# Altium PCB SDPRev0_0.PcbDoc
Units mil, origin at the board's own origin, x right, y up, seen from the top; angles counter-clockwise.
Board outline 10690 x 1755 mil, 2 copper layers (Top Layer, Bottom Layer); 16 components, 0 nets, 122 pads, 16 vias.
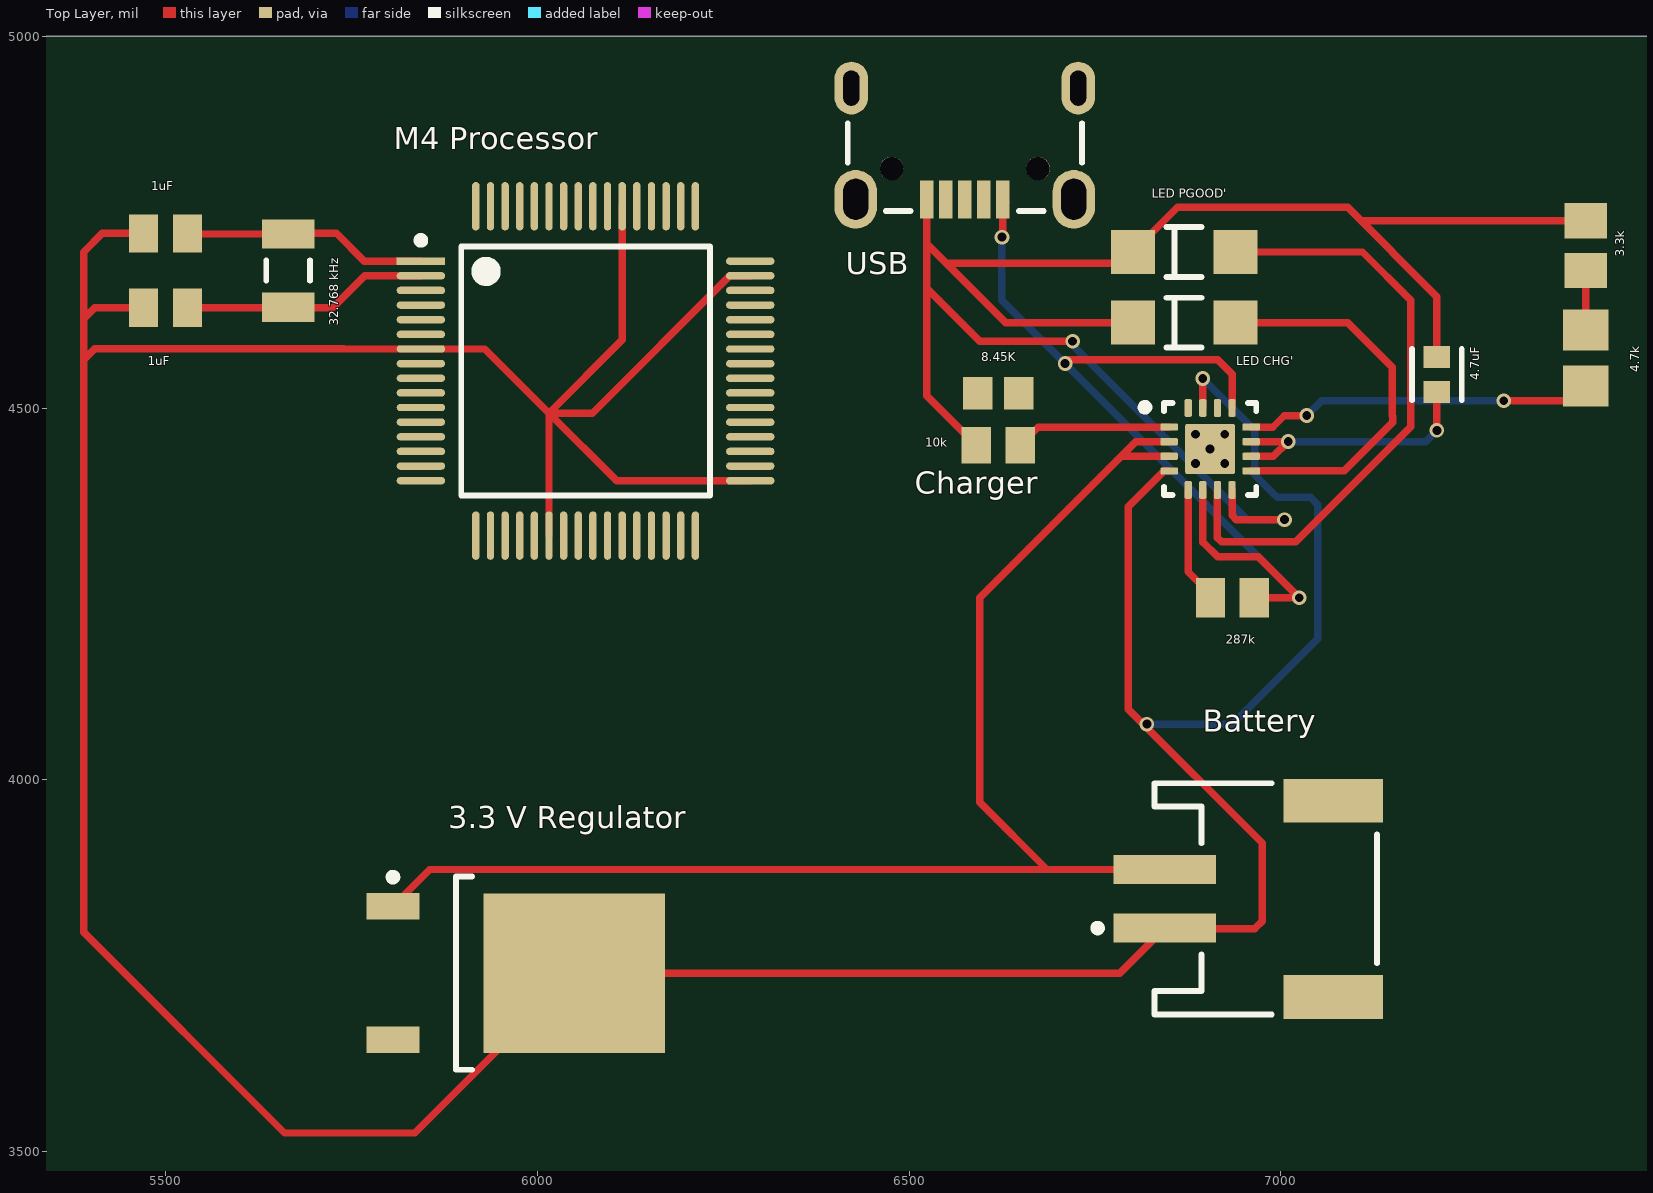
[diagram p0: Top Layer view]
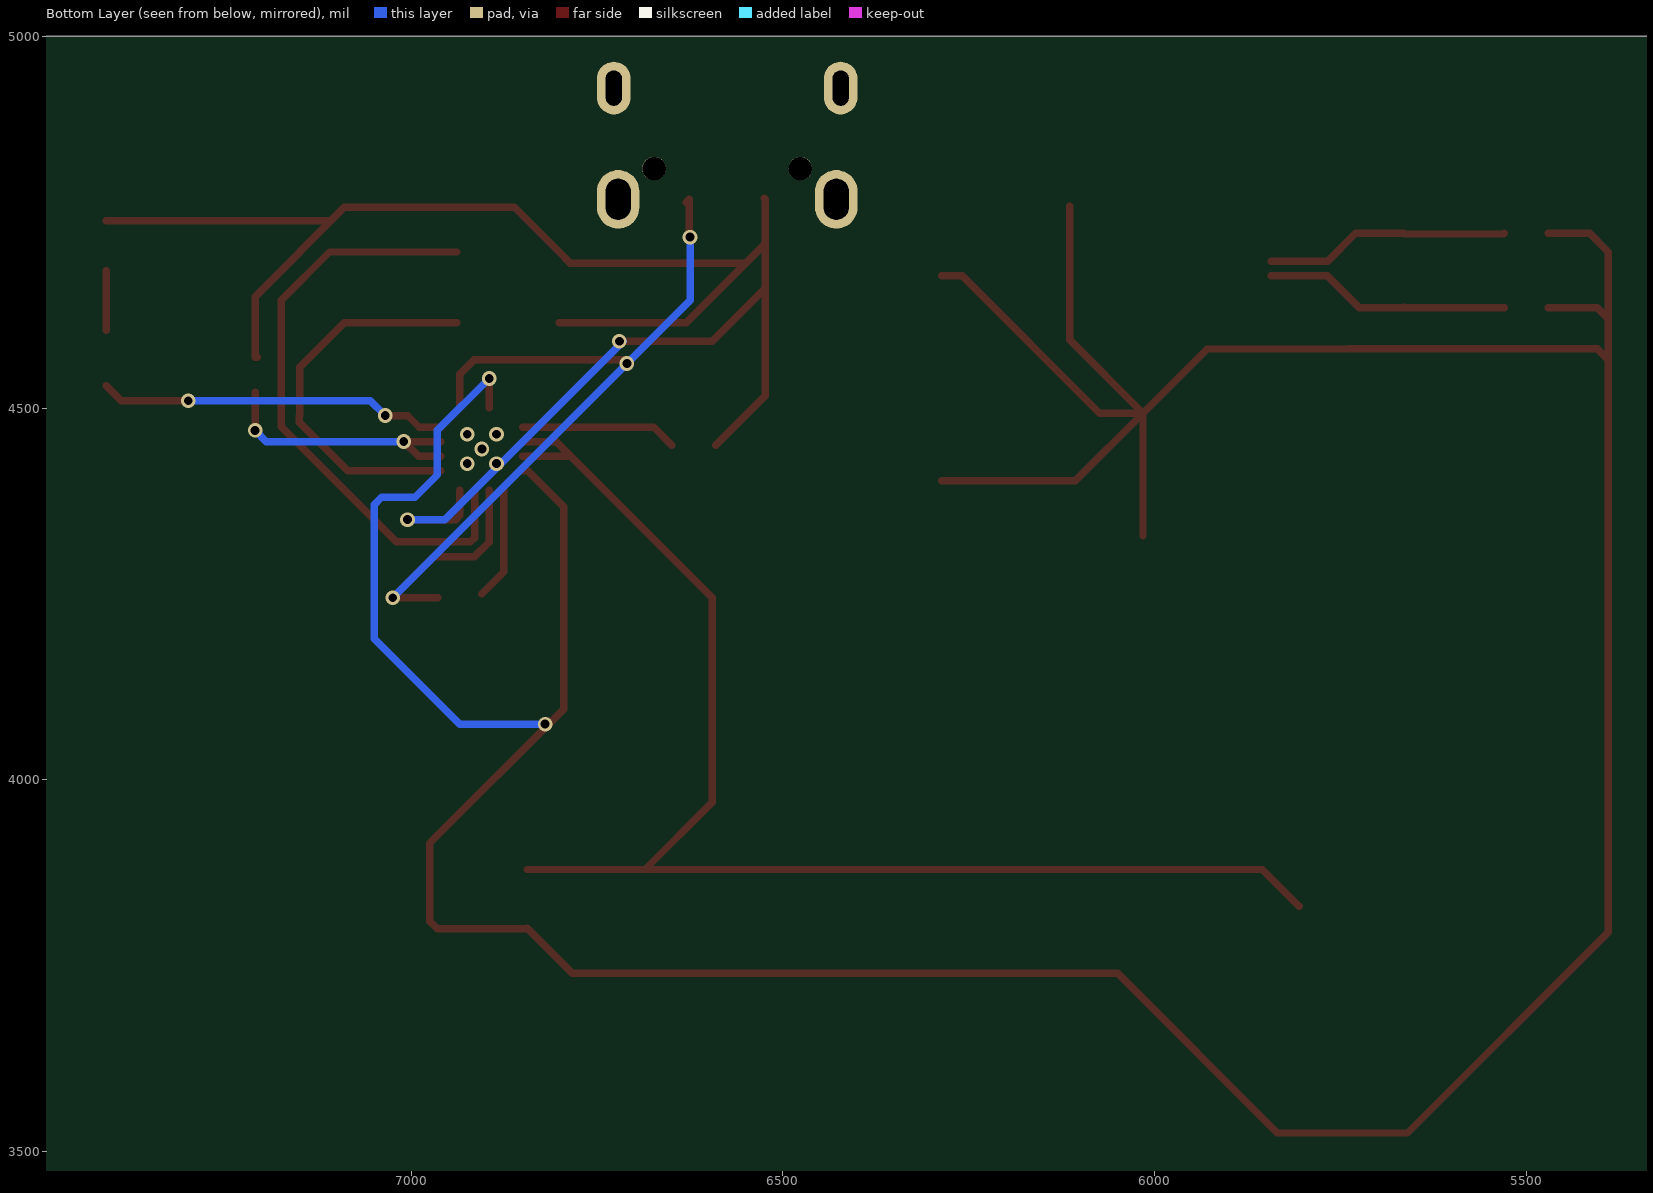
[diagram p1: Bottom Layer view, seen from below]

## Layer stack, top to bottom
Top Solder: solder mask 0.4, Solder Resist, Dk 3.5
Top Layer: signal copper 1.4
Dielectric 1: dielectric 12.6, FR-4, Dk 4.8
Bottom Layer: signal copper 1.4
Bottom Solder: solder mask 0.4, Solder Resist, Dk 3.5

## Board outline
1000,3245 11690,3245 11690,5000 1000,5000

## Design rules (kind name [scope] priority, off if disabled: settings)
Clearance [All] p1: gap=10 ignorepadtopadclearanceinfootprint=FALSE except(0: Arc-Hole Track-Hole SMDPad-Hole THPad-Hole Via-Hole Fill-Hole Poly-Hole Region-Hole Text-Hole)
PolygonConnect [All] p1: connectstyle=Relief reliefconductorwidth=10 reliefentries=4 polygonreliefangle="90 Angle" airgapwidth=10
RoutingVias [All] p1: holewidth=28 width=50 viastyle="Through Hole" minholewidth=28 minwidth=50 maxholewidth=28 maxwidth=50
SolderMaskExpansion [All] p1: expansion=4 istentingtop=FALSE
Width [All] p1: maxlimit=10 minlimit=10 preferedwidth=10
30 further rules are at their usual default settings.

## Components (designator, comment, footprint, x,y, rotation, side; value= is the part's Value field where it differs from the comment)
1uF "Comment" CAPC2013X135X45LL10T25 5500,4635 r0 top
1uF "Comment" CAPC2013X135X45LL10T25 5500,4735 r0 top
"3.3 V Regulator" "Comment" TO-252_L 5971.26,3740 r0 top
3.3k "Comment" RESC2013X60X40NL20T25 7410,4718.46 r90 top
4.7k "Comment" RESC2013X60X40ML20T25 7410,4567.4 r90 top
4.7uF "Comment" FP-C0603-CG-MFG 7210,4545 r90 top
8.45K "Comment" RESC1608X55X30ML20T20 6620,4520 r0 top
10k "Comment" RESC2013X60X40LL20T25_A 6620,4450 r0 top
"32.768 kHz" "Comment" ABRA-ABS07_A_V 5665,4685 r90 top
287k "Comment" RESC2013X60X40LL20T25 6935,4245 r0 top
Battery "Comment" "JST- S2B-PH-SM4-TB(LF)(SN)-2_V" 6980,3840 r90 top
Charger "Comment" RGT0016C_V 6905,4445 r0 top
"LED CHG'" "Comment" FP-HSMG-C150-MFG 6870,4615 r0 top
"LED PGOOD'" "Comment" FP-HSMG-C150-MFG 6870,4710 r0 top
"M4 Processor" "Comment" FP-C04-085-IPC_B 6065,4550 r0 top
USB "Comment" 629105150521 6575,4895 r180 top

## Footprints (in the part's own frame and the unit in brackets; to place one, negate y for a bottom-side part, rotate by r counter-clockwise, add the part's x,y. Pads: shape width x height; smd on the part's side, far side on the other; paste and mask are expansions set on the pad)
629105150521 [mm] "Micro USB 2.0 SMT Type B Horizontal 5 Contacts High Current"
  rect 0.45x1.3 smd: 1(-1.3,2.9) 2(-0.65,2.9) 3(0,2.9) 4(0.65,2.9) 5(1.3,2.9)
  round 0.8 hole 0.8 unplated: MH1(-2.5,1.85) MH2(2.5,1.85)
  oval 1.15x1.8 hole 0.55 slot 1.2 at 90 deg: Shell(-3.875,-0.9) Shell(3.875,-0.9)
  oval 1.45x2 hole 0.85 slot 1.4 at 90 deg: Shell(-3.725,2.9) Shell(3.725,2.9)
  silkscreen extent -4,0.3 4,3.3, body extent -4,-3.3 4,3.3, height 2.75
ABRA-ABS07_A_V [mm] "SMD, 2-Leads, Body 3.2x1.5mm"
  rect 1x1.8 smd: 1(-1.25,0) 2(1.25,0)
  silkscreen extent -0.35,-0.75 0.35,0.75, body extent -1.6,-0.75 1.6,0.75, height 0.9
CAPC2013X135X45LL10T25 [mm] "Chip Capacitor, 2-Leads, Body 2.00x1.25mm, IPC High Density"
  rect 1x1.3 smd: 1(-0.75,0) 2(0.75,0)
  body extent -1.05,-0.67 1.05,0.68, height 1.35
FP-C04-085-IPC_B [mm]
  rect 1.655x0.252 smd paste+0 mask+0: 1(-5.625,3.75)
  rrect100% 1.655x0.252 smd paste+0 mask+0: 2(-5.625,3.25) 3(-5.625,2.75) 4(-5.625,2.25) 5(-5.625,1.75) 6(-5.625,1.25) 7(-5.625,0.75) 8(-5.625,0.25) 9(-5.625,-0.25) 10(-5.625,-0.75) 11(-5.625,-1.25) 12(-5.625,-1.75) 13(-5.625,-2.25) 14(-5.625,-2.75) 15(-5.625,-3.25) 16(-5.625,-3.75) 33(5.625,-3.75) 34(5.625,-3.25) 35(5.625,-2.75) 36(5.625,-2.25) 37(5.625,-1.75) 38(5.625,-1.25) 39(5.625,-0.75) 40(5.625,-0.25) 41(5.625,0.25) 42(5.625,0.75) 43(5.625,1.25) 44(5.625,1.75) 45(5.625,2.25) 46(5.625,2.75) 47(5.625,3.25) 48(5.625,3.75)
  rrect100% 0.252x1.655 smd paste+0 mask+0: 17(-3.75,-5.625) 18(-3.25,-5.625) 19(-2.75,-5.625) 20(-2.25,-5.625) 21(-1.75,-5.625) 22(-1.25,-5.625) 23(-0.75,-5.625) 24(-0.25,-5.625) 25(0.25,-5.625) 26(0.75,-5.625) 27(1.25,-5.625) 28(1.75,-5.625) 29(2.25,-5.625) 30(2.75,-5.625) 31(3.25,-5.625) 32(3.75,-5.625) 49(3.75,5.625) 50(3.25,5.625) 51(2.75,5.625) 52(2.25,5.625) 53(1.75,5.625) 54(1.25,5.625) 55(0.75,5.625) 56(0.25,5.625) 57(-0.25,5.625) 58(-0.75,5.625) 59(-1.25,5.625) 60(-1.75,5.625) 61(-2.25,5.625) 62(-2.75,5.625) 63(-3.25,5.625) 64(-3.75,5.625)
  silkscreen extent -5.75,-4.25 4.25,4.58, body extent -6.7,-6.7 6.7,6.7, height 0.25
FP-C0603-CG-MFG [mm]
  rect 0.75x0.9 smd paste+0 mask+0: 1(-0.6,0) 2(0.6,0)
  silkscreen extent -0.87,-0.85 0.87,0.85, body extent -1.2,-0.6 1.2,0.6, height 0.25
FP-HSMG-C150-MFG [mm]
  rect 1.5x1.5 smd paste+0 mask+0: 1(-1.75,0) 2(1.75,0)
  silkscreen extent -0.6,-0.85 0.6,0.85, body extent -2.6,-0.95 2.6,0.95, height 0.25
"JST- S2B-PH-SM4-TB(LF)(SN)-2_V" [mm] "SMD, 2-Leads, Body 7.9x7.6mm, Pitch 2mm"
  rect 1x3.5 smd: 1(-1,3.45) 2(1,3.45)
  rect 1.5x3.4 smd: MP1(-3.35,-2.3) MP2(3.35,-2.3)
  silkscreen extent -3.95,-3.8 3.95,5.87, body extent -3.95,-3.8 3.95,4.8, height 5.6
RESC1608X55X30ML20T20 [mm] "Chip Resistor, 2-Leads, Body 1.60x0.80mm, IPC Low Density"
  rect 1x1.1 smd: 1(-0.7,0) 2(0.7,0)
  body extent -0.9,-0.5 0.9,0.5, height 0.55
RESC2013X60X40LL20T25 [mm] "Chip Resistor, 2-Leads, Body 2.00x1.25mm, IPC High Density"
  rect 1x1.35 smd: 1(-0.75,0) 2(0.75,0)
  body extent -1.1,-0.72 1.1,0.72, height 0.6
RESC2013X60X40LL20T25_A [mm] "Chip Resistor, 2-Leads, Body 2.20x1.35mm, IPC High Density"
  rect 1x1.25 smd: 1(-0.75,0) 2(0.75,0)
  body extent -1.1,-0.67 1.1,0.67, height 0.6
RESC2013X60X40ML20T25 [mm] "Chip Resistor, 2-Leads, Body 2.00x1.25mm, IPC Low Density"
  rect 1.4x1.55 smd: 1(-0.95,0) 2(0.95,0)
  body extent -1.1,-0.72 1.1,0.72, height 0.6
RESC2013X60X40NL20T25 [mm] "Chip Resistor, 2-Leads, Body 2.00x1.25mm, IPC Medium Density"
  rect 1.2x1.45 smd: 1(-0.85,0) 2(0.85,0)
  body extent -1.1,-0.72 1.1,0.72, height 0.6
RGT0016C_V [mm] "QFN, 16-Leads, Body 3x3mm, Pitch 0.5mm, Thermal Pad 1.65x1.65mm"
  rrect40% 0.6x0.25 smd: 1(-1.4,0.75) 2(-1.4,0.25) 3(-1.4,-0.25) 4(-1.4,-0.75) 9(1.4,-0.75) 10(1.4,-0.25) 11(1.4,0.25) 12(1.4,0.75)
  rrect40% 0.25x0.6 smd: 5(-0.75,-1.4) 6(-0.25,-1.4) 7(0.25,-1.4) 8(0.75,-1.4) 13(0.75,1.4) 14(0.25,1.4) 15(-0.25,1.4) 16(-0.75,1.4)
  rrect6% 1.7x1.7 smd paste-0.85: 17(0,0)
  rrect6% 1.55x1.55 on Top Paste: 17(0,0)
  silkscreen extent -2.35,-1.58 1.58,1.58, body extent -1.5,-1.5 1.5,1.5, height 1
TO-252_L [mm] "D-PAK, 4-Leads, Body 6.1x6.5mm, Pitch 2.28mm, Lead Span 9.7mm, IPC High Density"
  rect 1.8x0.9 smd: 1(-4.2,2.28) 3(-4.2,-2.28)
  rect 6.2x5.45 smd: 4(2,0)
  silkscreen extent -4.32,-3.3 -1.5,3.4, body extent -2.05,-3.3 4.15,3.3, height 2.4

## Via types
v1: diameter 19.68, hole 11.81, Top Layer to Bottom Layer, 16 vias

## Nets (pads, with @x,y where several pads share a name; then routed paths per layer and width w, separated by ;. In a path a pad name is that pad's centre, name@x,y a point inside that pad or via, vN(x,y) a via of type N, cw(c..) or ccw(c..) an arc to the next point about the centre after c; other vN are vias at no path point)
pads on no net: 1uF.1 1uF.2 3.3k.1 3.3k.2 4.7k.1 4.7k.2 4.7uF.1 4.7uF.2 8.45K.1 8.45K.2 10k.1 10k.2 287k.1 287k.2 "3.3 V Regulator.1" "3.3 V Regulator.3" "3.3 V Regulator.4" "32.768 kHz.1" "32.768 kHz.2" "LED CHG'.1" "LED CHG'.2" "LED PGOOD'.1" "LED PGOOD'.2" "M4 Processor.1" "M4 Processor.2" "M4 Processor.3" "M4 Processor.4" "M4 Processor.5" "M4 Processor.6" "M4 Processor.7" "M4 Processor.8" "M4 Processor.9" "M4 Processor.10" "M4 Processor.11" "M4 Processor.12" "M4 Processor.13" "M4 Processor.14" "M4 Processor.15" "M4 Processor.16" "M4 Processor.17" "M4 Processor.18" "M4 Processor.19" "M4 Processor.20" "M4 Processor.21" "M4 Processor.22" "M4 Processor.23" "M4 Processor.24" "M4 Processor.25" "M4 Processor.26" "M4 Processor.27" "M4 Processor.28" "M4 Processor.29" "M4 Processor.30" "M4 Processor.31" "M4 Processor.32" "M4 Processor.33" "M4 Processor.34" "M4 Processor.35" "M4 Processor.36" "M4 Processor.37" "M4 Processor.38" "M4 Processor.39" "M4 Processor.40" "M4 Processor.41" "M4 Processor.42" "M4 Processor.43" "M4 Processor.44" "M4 Processor.45" "M4 Processor.46" "M4 Processor.47" "M4 Processor.48" "M4 Processor.49" "M4 Processor.50" "M4 Processor.51" "M4 Processor.52" "M4 Processor.53" "M4 Processor.54" "M4 Processor.55" "M4 Processor.56" "M4 Processor.57" "M4 Processor.58" "M4 Processor.59" "M4 Processor.60" "M4 Processor.61" "M4 Processor.62" "M4 Processor.63" "M4 Processor.64" Battery.1 Battery.2 Battery.MP1 Battery.MP2 Charger.1 Charger.2 Charger.3 Charger.4 Charger.5 Charger.6 Charger.7 Charger.8 Charger.9 Charger.10 Charger.11 Charger.12 Charger.13 Charger.14 Charger.15 Charger.16 Charger.17 USB.1 USB.2 USB.3 USB.4 USB.5 USB.MH1 USB.MH2 USB.Shell
copper on no net: | length 15184
  Top Layer w10: 5390,4620 5405,4635 5470.47,4635 ; 5470.47,4735 5415,4735 5390,4710 5390,4565 ; 5529.53,4635 5664.21,4635 ; 5529.53,4735 5530.31,4734.21 5665,4734.21 5665.79,4735 5730,4735 5767.36,4697.64 5843.52,4697.64 ; 5665.79,4635 5665,4635.79 5664.21,4635 ; 5805.91,3829.76 5855.51,3879.37 6685.63,3879.37 ; 5843.52,4677.95 5777.95,4677.95 5767.95,4677.95 5725,4635 5664.21,4635 ; 6015.79,4328.52 6015.79,4493.27 ; 6114.21,4771.48 6114.21,4591.69 6015.79,4493.27 ; 6286.48,4402.36 6106.69,4402.36 6015.79,4493.27 ; 6286.48,4677.95 6258.92,4677.95 6074.24,4493.27 6015.79,4493.27 ; 6523.82,4721.2 6550.02,4695 ; 6525,4782.01 6523.82,4780.83 6523.82,4661.57 6523.82,4661.18 ; 6590.47,4450 6523.82,4516.65 6523.82,4661.18 ; v1(6625,4730) 6626.18,4731.18 6626.18,4780.83 6630,4777.01 ; 6649.53,4450 6674.06,4474.53 6849.88,4474.53 ; v1(6710,4560) 6715,4565 6915,4565 6934.53,4545.47 6934.53,4500.12 ; v1(6720,4590) 6595,4590 6585,4600 6523.82,4661.18 ; 6787.42,4437.42 6789.69,4435.16 6849.88,4435.16 ; 6801.1,4615 6630.02,4615 6550.02,4695 ; 6844.17,3879.37 6685.63,3879.37 ; 6849.88,4415.47 6843.15,4415.47 6795,4367.32 6795,4350 6795,4095 6975,3915 6975,3810 6965,3800 6844.8,3800 6844.17,3800.63 6783.54,3740 6050,3740 5835,3525 5660,3525 5390,3795 5390,4565 ; 6849.88,4454.84 6804.84,4454.84 6770,4420 6595,4245 6595,3970 6685.63,3879.37 ; 6875.47,4389.88 6875.47,4279.53 6905,4250 ; v1@6895,4540 v1(6895.16,4539.84) 6895.16,4500.12 ; 6895.16,4389.88 6895.16,4319.84 6915,4300 6970,4300 v1(7025,4245) 6964.53,4245 ; 6914.84,4389.88 6914.84,4325.86 6920.7,4320 7020,4320 7175,4475 7175,4645 7110,4710 7015,4710 ; 6934.53,4389.88 6934.53,4355.86 6940.39,4350 v1(7005,4350) ; 6938.9,4615 7090,4615 7150,4555 7150,4490 7150.86,4489.14 7150.86,4480.86 7085.47,4415.47 6960.12,4415.47 ; 6938.9,4710 7010,4710 7020,4710 ; 6960.12,4435.16 6990.16,4435.16 v1@7009.84,4454.84 ; 6960.12,4454.84 v1@7009.84,4454.84 ; 6960.12,4474.53 6989.53,4474.53 7005,4490 v1(7035,4490) ; v1(7010,4455) v1@7009.84,4454.84 ; 7207.05,4568.62 7210,4568.62 7210,4650 7090,4770 ; v1(7210,4470) 7210,4521.38 ; v1(7300,4510) 7390,4510 7410,4530 ; 7410,4604.8 7410,4685 ; 7410,4751.93 7108.07,4751.93 7090,4770 ; 5390,4565 5405,4580 5420,4580 5740,4580 5740.47,4579.53 5843.52,4579.53 5929.53,4579.53 6015.79,4493.27 ; 6550.02,4695 6755,4695 6786.1,4695 6801.1,4710 6861.1,4770 7090,4770
  Bottom Layer w10: v1(6625,4730) 6625,4645 v1(7025,4245) ; v1@6715,4590 6955,4350 v1(7005,4350) ; v1(6820,4075) 6935,4075 7050,4190 7050,4370 7040,4380 6995,4380 6965,4410 6965,4460 6965,4470 v1(6895.16,4539.84) ; v1(7010,4455) 7195,4455 v1(7210,4470) ; v1(7035,4490) 7055,4510 v1(7300,4510)
  other v1: 6885.32,4425.32 6924.69,4425.32 6905,4445 6885.32,4464.69 6924.69,4464.69

## Text inside footprints (layer, text, board x,y; h text height)
USB: Mechanical 2 "PCB Edge" at 6626.18,5024.92 h16 r180